# Altium PCB 隔离电源板.PcbDoc
Units mm, origin at the board's own origin, x right, y up, seen from the top; angles counter-clockwise.
Board outline 11.43 x 12.7 mm, 2 copper layers (Top Layer, Bottom Layer); 2 components, 4 nets, 10 pads, 1 vias.
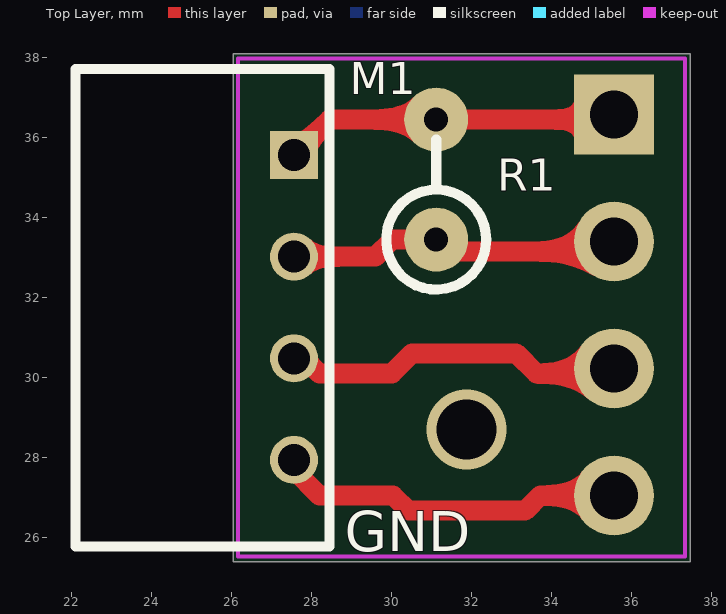
[diagram p0: Top Layer view]
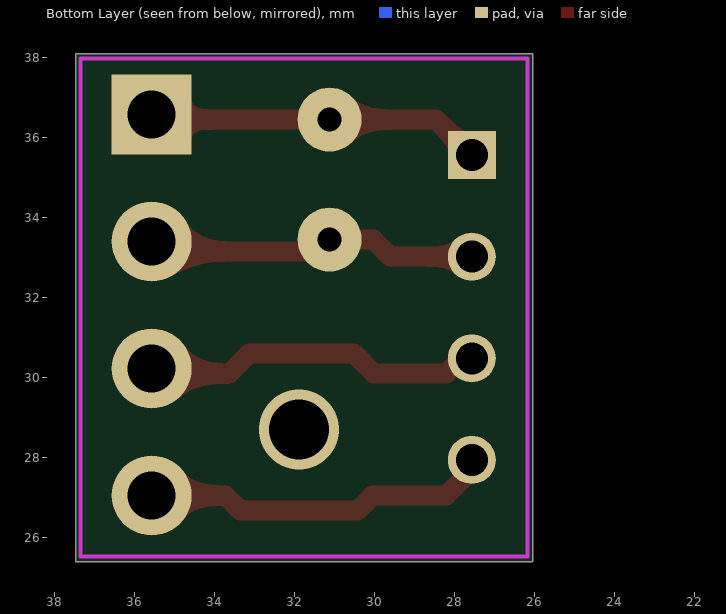
[diagram p1: Bottom Layer view, seen from below]

## Layer stack, top to bottom
Top Solder: solder mask 0.0102, Solder Resist, Dk 3.5
Top Layer: signal copper 0.0356
Dielectric 1: dielectric 0.32, FR-4, Dk 4.8
Bottom Layer: signal copper 0.0356
Bottom Solder: solder mask 0.0102, Solder Resist, Dk 3.5

## Board outline
26.035,25.4 26.035,38.1 37.465,38.1 37.465,25.4

## Design rules (kind name [scope] priority, off if disabled: settings)
Clearance [All] p1: gap=0.254 ignorepadtopadclearanceinfootprint=FALSE except(0: Arc-Hole Track-Hole SMDPad-Hole THPad-Hole Via-Hole Fill-Hole Poly-Hole Region-Hole Text-Hole)
PolygonConnect [All] p1: connectstyle=Relief reliefconductorwidth=0.254 reliefentries=4 polygonreliefangle="90 Angle" airgapwidth=0.254
RoutingVias [All] p1: holewidth=0.711 width=1.27 viastyle="Through Hole" minholewidth=0.711 minwidth=1.27 maxholewidth=0.711 maxwidth=1.27
SolderMaskExpansion [All] p1: expansion=0.102
Width Width_1 [All] p1: maxlimit=0.5 minlimit=0.254 preferedwidth=0.35
30 further rules are at their usual default settings.

## Components (designator, comment, footprint, x,y, rotation, side; value= is the part's Value field where it differs from the comment)
M1 "B0505S" B0505S-1W 27.559,27.94 r90 top
R1 "Res1" "RS 1/4W-V3" 31.115,33.449 r90 top

## Footprints (in the part's own frame and the unit in brackets; to place one, negate y for a bottom-side part, rotate by r counter-clockwise, add the part's x,y. Pads: shape width x height; smd on the part's side, far side on the other; paste and mask are expansions set on the pad)
B0505S-1W [mm] "11.68mm*6mm*9.65mm(长*宽*高）"
  round 1.2 hole 0.8: 1(0,0) 2(2.54,0) 3(5.08,0)
  rect 1.2x1.2 hole 0.8: 4(7.62,0)
  silkscreen extent -2.16,-0.89 9.78,5.46, body extent -2.03,-0.7 9.65,5.3, height 9.7
"RS 1/4W-V3" [mm] "直插色环电阻，脚距3mm，直径2.3mm"
  round 1.6 hole 0.6: 1(0,0) 2(3,0)
  silkscreen extent -1.25,-1.25 2.5,1.25, body extent -1.16,-1.16 3.23,1.16, height 7.42

## Part data
M1: "DC-DC模块"
R1: "Resistor"

## Free pads (board coordinates)
  rect 2x2 hole 1.2: 9(35.56,36.576)
  round 2 hole 1.2: 10(35.56,33.401) 11(35.56,30.226) 12(35.56,27.051)

## Via types
v1: diameter 2, hole 1.5, Top Layer to Bottom Layer, 1 vias

## Nets (pads, with @x,y where several pads share a name; then routed paths per layer and width w, separated by ;. In a path a pad name is that pad's centre, name@x,y a point inside that pad or via, vN(x,y) a via of type N, cw(c..) or ccw(c..) an arc to the next point about the centre after c; other vN are vias at no path point)
+5: M1.4 R1.2 | length 3.9
  Top Layer w0.5: M1.4 28.448,36.449 R1.2
"GND IN": M1.2
"GND OUT": M1.3 R1.1 | length 3.7
  Top Layer w0.5: M1.3 29.591,33.02 30.02,33.449 R1.1
VCC: M1.1
copper on no net: | length 26.4
  Top Layer w0.5: 27.559,27.94 27.559,27.686 28.194,27.051 30.035,27.051 30.416,26.67 33.337,26.67 33.718,27.051 35.56,27.051 ; 27.559,30.48 27.813,30.48 28.194,30.099 30.004,30.099 30.512,30.607 33.115,30.607 33.623,30.099 35.433,30.099 ; 31.115,33.449 31.321,33.449 31.623,33.147 35.433,33.147 35.433,33.274 35.56,33.401 ; 31.115,36.449 35.433,36.449
  other v1: 31.877,28.702

## Keep-outs
Keep-Out Layer:
  lines w0.1: 26.162,25.527 26.162,37.973 37.338,37.973 37.338,25.527 26.162,25.527

## Silkscreen, mask and mechanical layers (free items; w line width, h text height)
Top Overlay:
  text "GND" at 28.829,25.654 h1